# Altium PCB PCB1.PcbDoc
Units mm, origin at the board's own origin, x right, y up, seen from the top; angles counter-clockwise.
Board outline 133.73 x 50.42 mm, 2 copper layers (Top Layer, Bottom Layer); 14 components, 4 nets, 38 pads, 0 vias.
Unrouted connection lines stored in the file: 4.
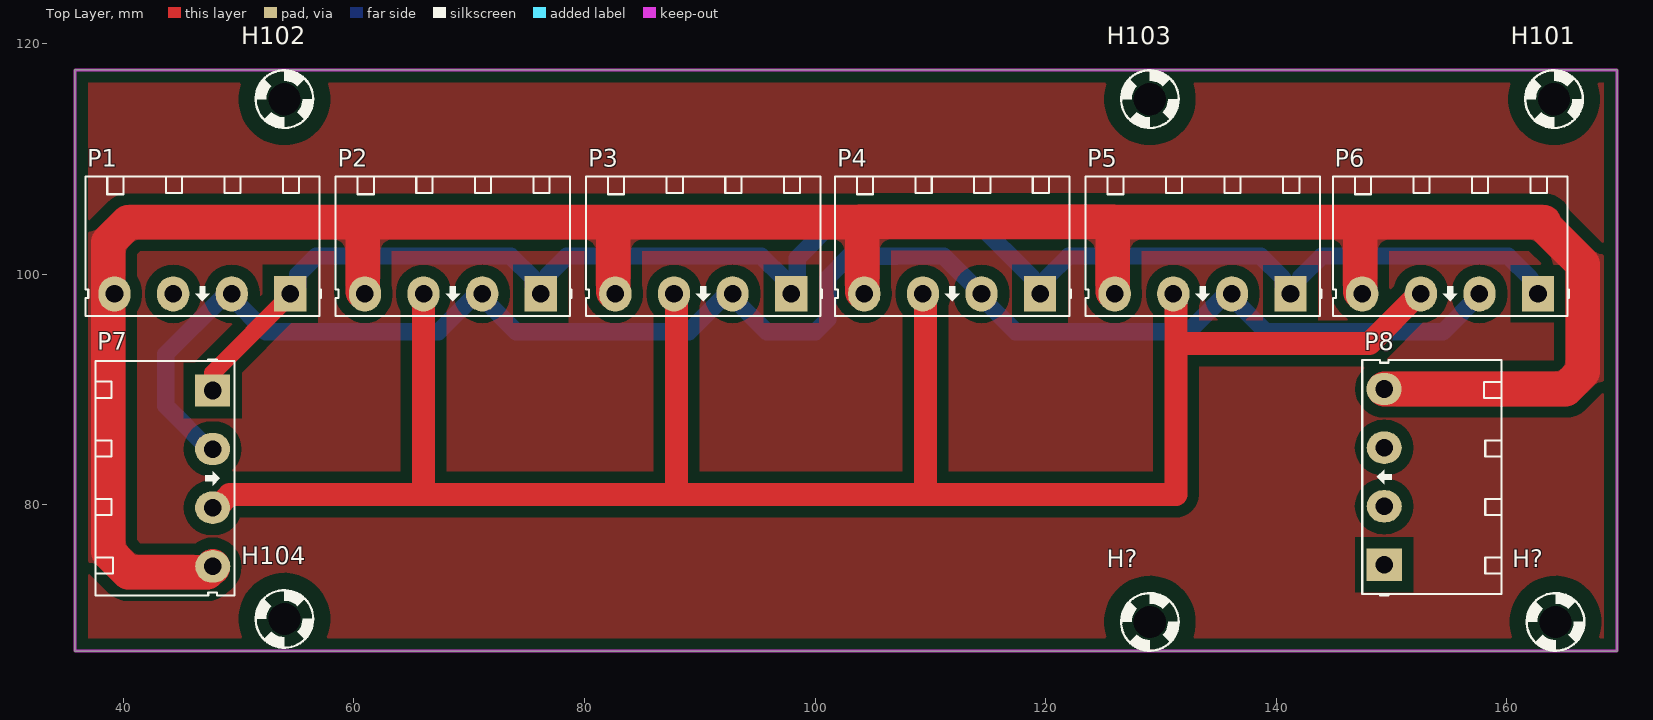
[diagram p0: Top Layer view]
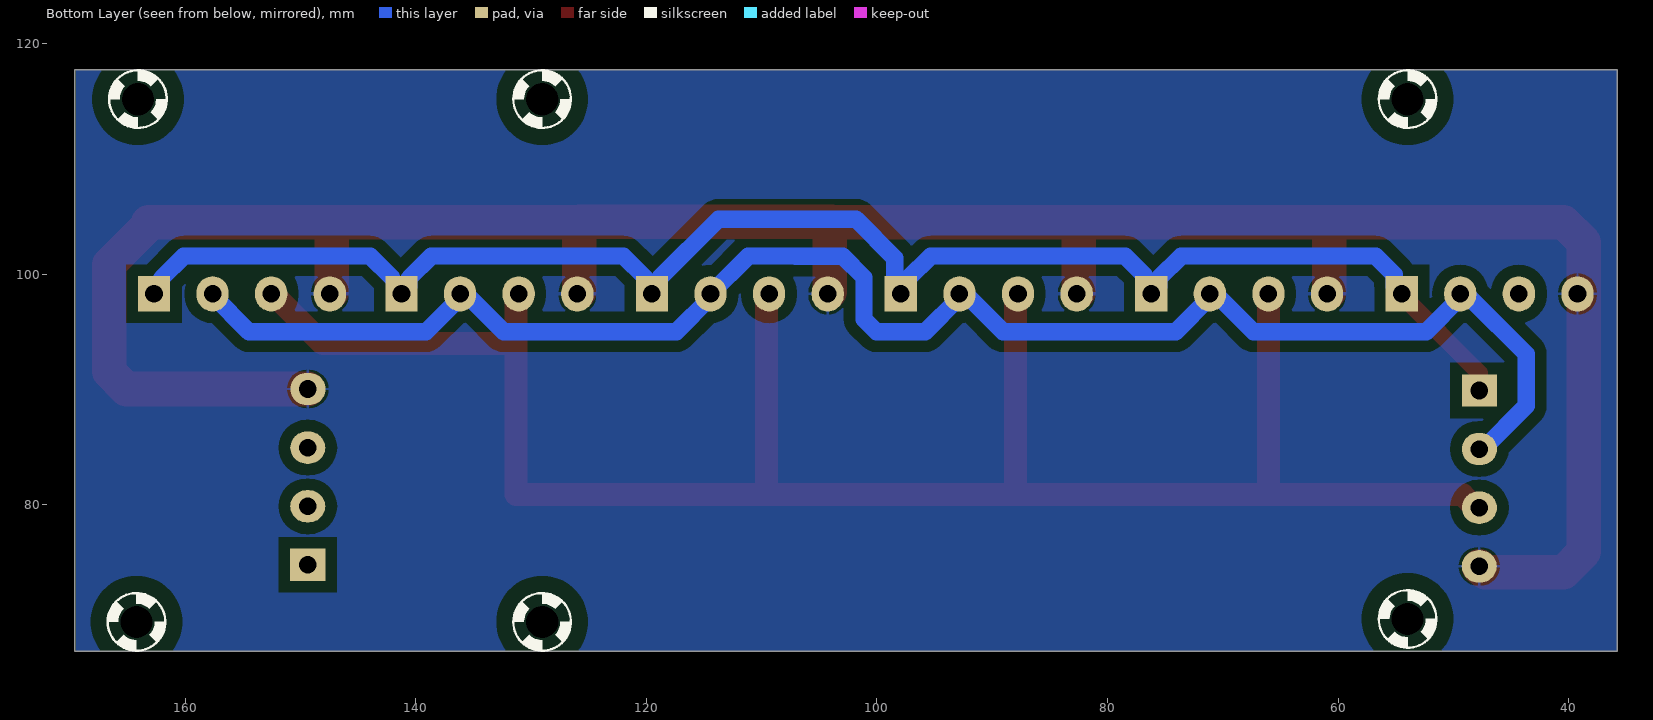
[diagram p1: Bottom Layer view, seen from below]

## Layer stack, top to bottom
Top Solder: solder mask 0.0102, Solder Resist, Dk 3.5
Top Layer: signal copper 0.0356
Dielectric 1: dielectric 0.32, FR-4, Dk 4.8
Bottom Layer: signal copper 0.0356
Bottom Solder: solder mask 0.0102, Solder Resist, Dk 3.5

## Board outline
35.814,67.31 35.814,117.729 169.545,117.729 169.545,67.31

## Design rules (kind name [scope] priority, off if disabled: settings)
Clearance [All] p1: gap=1 ignorepadtopadclearanceinfootprint=FALSE
PolygonConnect [All] p1: connectstyle=Relief reliefconductorwidth=0.254 reliefentries=4 polygonreliefangle="90 Angle" airgapwidth=0.254
RoutingVias [All] p1: holewidth=0.711 width=1.27 viastyle="Through Hole" minholewidth=0.711 minwidth=1.27 maxholewidth=0.711 maxwidth=1.27
SolderMaskExpansion [All] p1: expansion=0.102 istentingtop=FALSE
Width [All] p1: maxlimit=3 minlimit=1 preferedwidth=1.5 minimp=50.000000 maximp=50.000000 favimp=50.000000
30 further rules are at their usual default settings.

## Classes and differential pairs
component class Sheet1: H101 H102 H103 H104 H? P1 P2 P3 P4 P5 P6 P7 P8

## Components (designator, comment, footprint, x,y, rotation, side; value= is the part's Value field where it differs from the comment)
H101 "Screw Hole" SCREW/2.8/5.0 164.084,115.189 r0 top
H102 "Screw Hole" SCREW/2.8/5.0 53.975,115.189 r0 top
H103 "Screw Hole" SCREW/2.8/5.0 129.032,115.189 r0 top
H104 "Screw Hole" SCREW/2.8/5.0 53.975,70.104 r0 top
H? "Screw Hole" SCREW/2.8/5.0 164.211,69.85 r0 top
H? "Screw Hole" SCREW/2.8/5.0 129.032,69.85 r0 top
P1 "Header 4" HDR/Terminal/4/RA 46.863,98.298 r180 top
P2 "Header 4" HDR/Terminal/4/RA 68.58,98.298 r180 top
P3 "Header 4" HDR/Terminal/4/RA 90.297,98.298 r180 top
P4 "Header 4" HDR/Terminal/4/RA 111.887,98.298 r180 top
P5 "Header 4" HDR/Terminal/4/RA 133.604,98.298 r180 top
P6 "Header 4" HDR/Terminal/4/RA 155.067,98.298 r180 top
P7 "Header 4" HDR/Terminal/4/RA 47.755,82.293 r270 top
P8 "Header 4" HDR/Terminal/4/RA 149.352,82.423 r90 top

## Footprints (in the part's own frame and the unit in brackets; to place one, negate y for a bottom-side part, rotate by r counter-clockwise, add the part's x,y. Pads: shape width x height; smd on the part's side, far side on the other; paste and mask are expansions set on the pad)
HDR/Terminal/4/RA [mil] "Header 4, 4 pin, hight 300mil, Pin to Pin 200, Colour Green"
  rect 110x120 hole 60: 1(-300.2,-0.2)
  oval 110x120 hole 60: 2(-100.2,-0.2) 3(99.87,-0.13) 4(300.2,0.2)
  silkscreen extent -405,-400 400,75, body extent -390,-403 392,70, height 334
SCREW/2.8/5.0 [mm]
  round 0 hole 2.8 unplated: 1(0,0)
  Top Layer pour cut-out: -4,0 -3.696,1.531 -2.828,2.828 -1.531,3.695 0,4 0,4 1.531,3.695 2.828,2.828 3.695,1.531 4,0 4,0 3.696,-1.531 2.828,-2.828 1.531,-3.696 0,-4 0,-4 -1.531,-3.696 -2.828,-2.828 -3.696,-1.531 -4,0
  Bottom Layer pour cut-out: -4,0 -3.696,1.531 -2.828,2.828 -1.531,3.695 0,4 0,4 1.531,3.695 2.828,2.828 3.695,1.531 4,0 4,0 3.696,-1.531 2.828,-2.828 1.531,-3.696 0,-4 0,-4 -1.531,-3.696 -2.828,-2.828 -3.696,-1.531 -4,0
  silkscreen extent -2.5,-2.5 2.5,2.5

## Part data
P1 P2 P3 P4 P5 P6 P7 P8: "Header, 4-Pin"
H101 H102 H103 H104 H? H?: TYPE=NO-BOM, UNIT PRICE=0

## Nets (pads, with @x,y where several pads share a name; then routed paths per layer and width w, separated by ;. In a path a pad name is that pad's centre, name@x,y a point inside that pad or via, vN(x,y) a via of type N, cw(c..) or ccw(c..) an arc to the next point about the centre after c; other vN are vias at no path point)
GND: P1.4 P2.4 P3.4 P4.4 P5.4 P6.4 P7.4 P8.4 | length 224.1
  Top Layer w0.254: 60.779,104.267 61.033,104.521
  Top Layer w3: P7.4 47.76,74.589 47.736,74.565 47.657,74.565 47.261,74.168 40.438,74.168 38.681,75.925 38.681,102.764 40.438,104.521 61.033,104.521 103.936,104.521 ; P2.4@60.779,98.479 60.779,104.267 ; P3.4@82.496,98.479 82.496,103.886 ; 103.935,104.545 104.086,104.545 ; P4.4@104.086,98.479 104.086,104.545 ; P5.4@125.803,98.479 125.803,104.545 104.086,104.545 ; 125.828,104.521 147.266,104.521 ; P6.4@147.266,98.479 147.266,104.521 ; P8.4 165.105,90.048 166.589,91.532 166.589,100.863 163.195,104.257 163.195,104.521 147.266,104.521
"Sig A": P1.1 P2.1 P3.1 P4.1 P5.1 P6.1 P7.1 P8.1 | length 137.9
  Top Layer w1.5: 47.752,91.44 54.483,98.171 P1.1@54.483,98.298
  Bottom Layer w1.5: P1.1 55.135,98.95 55.135,99.972 56.74,101.577 73.619,101.577 75.558,99.638 75.558,98.95 P2.1 76.852,98.95 76.852,99.972 78.457,101.577 95.336,101.577 97.275,99.638 97.275,98.95 P3.1 98.442,98.823 98.442,101.401 101.806,104.765 113.738,104.765 118.865,99.638 118.865,98.95 P4.1 120.159,98.95 120.159,99.765 121.971,101.577 138.643,101.577 140.582,99.638 140.582,98.95 P5.1 ; P5.1@142.13,99.765 143.942,101.577 160.106,101.577 162.045,99.638 162.045,98.95 P6.1 P6.1@162.565,98.176
"Sig B": P1.2 P2.2 P3.2 P4.2 P5.2 P6.2 P7.2 P8.2 | length 145.6
  Bottom Layer w1.5: P7.2 47.435,84.838 43.688,88.584 43.688,93.085 48.526,97.923 49.028,97.923 49.403,98.298 49.403,97.982 52.361,95.024 57.307,95.024 57.312,95.019 67.339,95.019 70.243,97.923 70.745,97.923 71.12,98.298 71.12,97.982 74.078,95.024 79.024,95.024 79.029,95.019 89.056,95.019 91.96,97.923 92.462,97.923 92.837,98.298 92.837,97.982 95.795,95.024 100.039,95.024 101.115,96.1 101.115,99.724 102.963,101.572 107.055,101.572 107.058,101.575 111.15,101.575 114.427,98.298 114.427,97.982 117.385,95.024 121.861,95.024 121.866,95.019 132.363,95.019 135.267,97.923 135.769,97.923 P5.2@136.144,98.298 ; P5.2@136.144,97.982 139.102,95.024 143.921,95.024 143.926,95.019 148.746,95.019 ; 148.751,95.024 154.46,95.024 157.612,98.176 P6.2 P6.2@157.833,98.082
VCC: P1.3 P2.3 P3.3 P4.3 P5.3 P6.3 P7.3 P8.3 | length 177.1
  Top Layer w2: P7.3@47.904,79.908 P7.3 48.094,79.756 49.237,80.899 66.04,80.899 ; P2.3@66.04,98.298 66.04,80.899 ; P3.3@87.757,98.298 87.909,98.146 87.909,97.458 87.98,97.387 87.98,80.899 ; P4.3@109.347,98.298 109.499,98.146 109.499,97.458 109.57,97.387 109.57,81.026 109.443,80.899 ; P5.3@131.064,98.298 131.216,98.146 131.216,97.458 131.287,97.387 131.287,93.98 ; P6.3@152.456,98.376 148.06,93.98 131.287,93.98 ; 66.04,80.899 66.294,80.899 87.98,80.899 ; 87.98,80.899 109.443,80.899 ; 109.443,80.899 131.287,80.899 131.287,93.98
pads on no net: H101.1 H102.1 H103.1 H104.1 H?.1

## Polygon pours and split planes (outlines as drawn)
no net on Top Layer "NONET_L01_P001" (solid, pour order 1): 35.814,117.729 35.814,67.31 35.941,67.437 169.418,67.437 169.418,117.602 169.545,117.729
GND on Top Layer "GND_L01_P000" (solid, pour order 0): 35.814,117.729 35.814,67.31 169.545,67.31 169.291,67.564 169.291,117.602
GND on Bottom Layer "GND_L02_P002" (solid, pour order 2): 35.814,117.729 35.814,67.31 169.545,67.31 169.418,67.437 169.418,117.729

## Keep-outs
Top Layer:
  the board outline again, w0.254